# Altium PCB PCB1.PcbDoc
Units mm, origin at the board's own origin, x right, y up, seen from the top; angles counter-clockwise.
Board outline 152.4 x 101.6 mm, 2 copper layers (Top Layer, Bottom Layer); 2 components, 4 nets, 20 pads, 1 vias.
Unrouted connection lines stored in the file: 1.
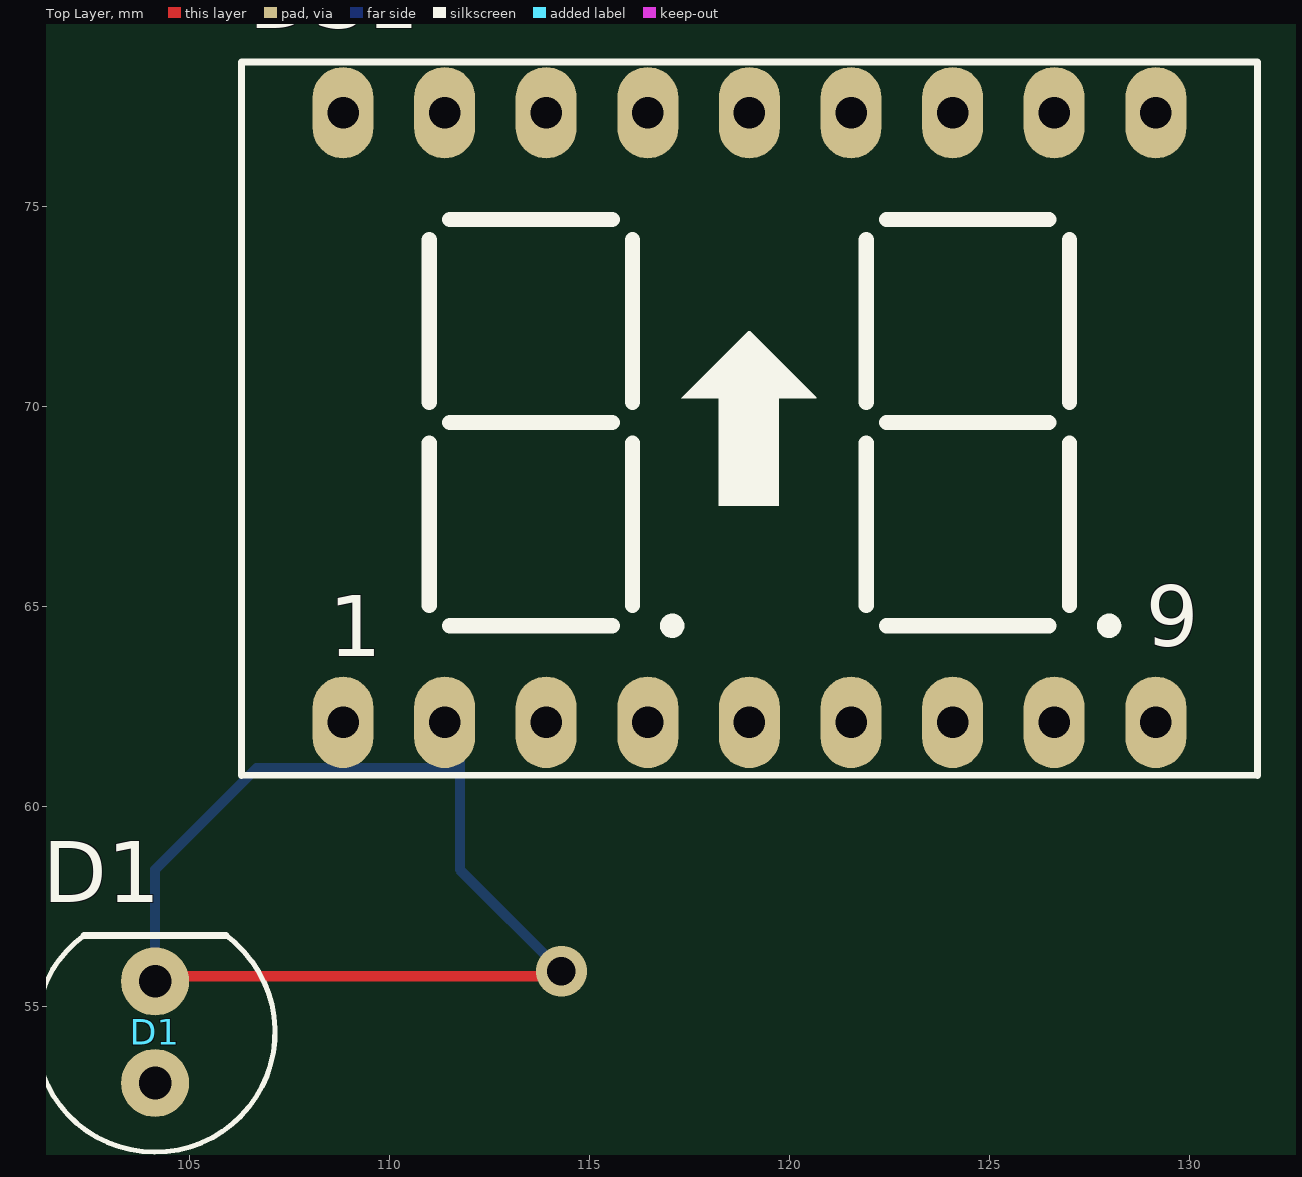
[diagram p0: Top Layer view]
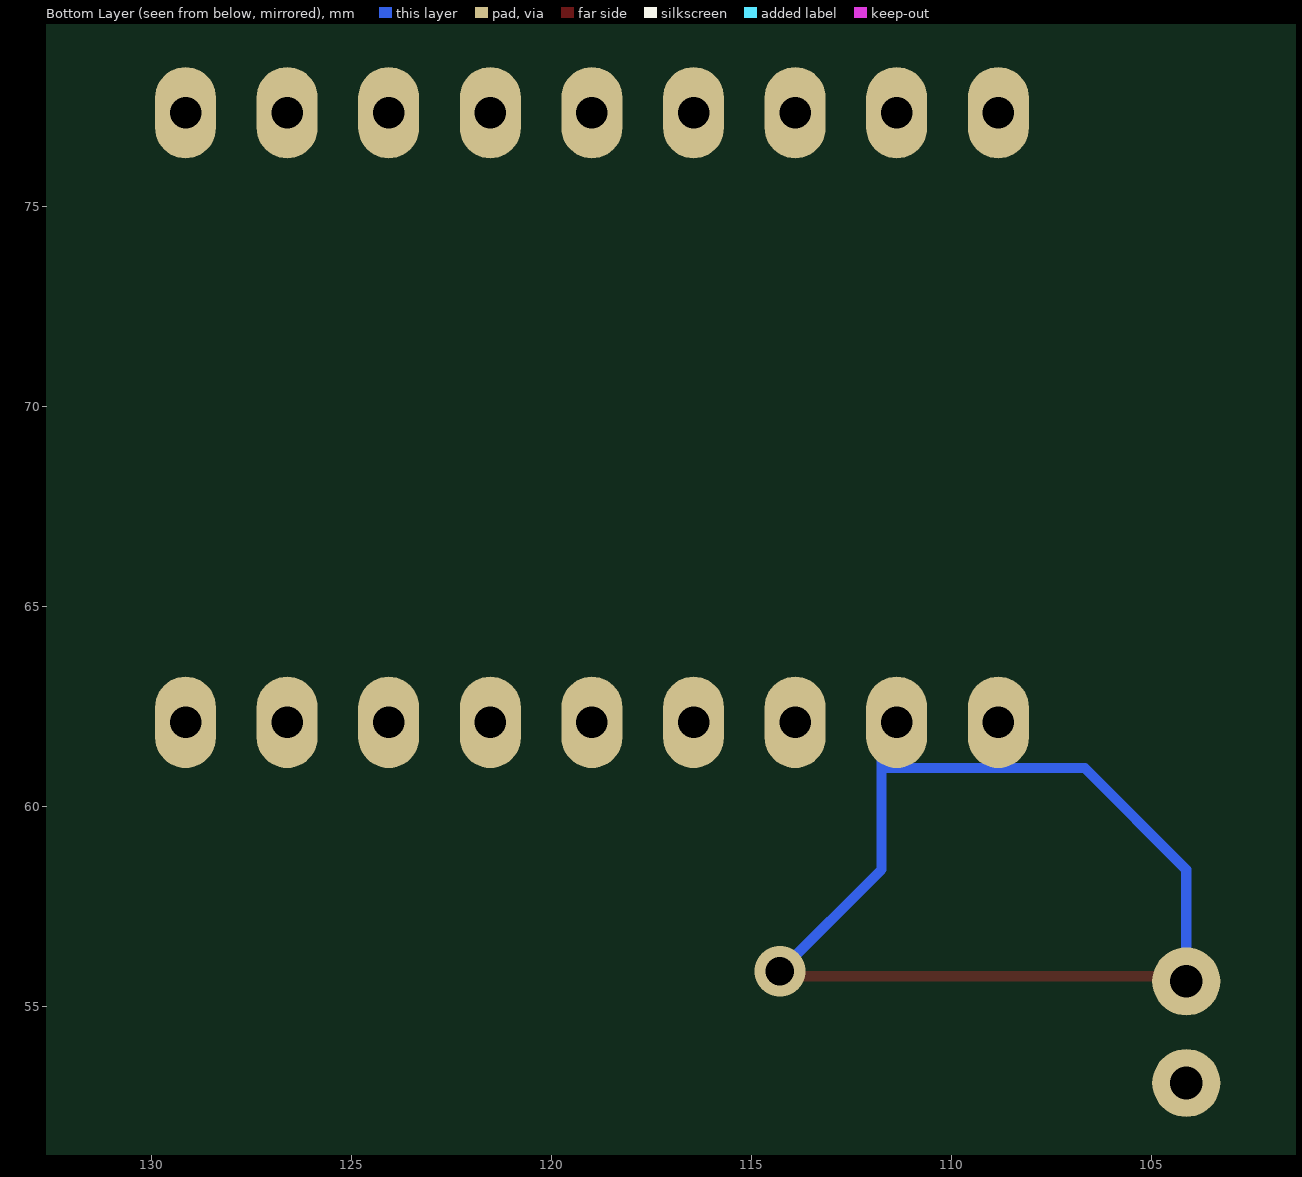
[diagram p1: Bottom Layer view, seen from below]

## Layer stack, top to bottom
Top Solder: solder mask 0.0102, Solder Resist, Dk 3.5
Top Layer: signal copper 0.0356
Dielectric 1: dielectric 0.32, FR-4, Dk 4.8
Bottom Layer: signal copper 0.0356
Bottom Solder: solder mask 0.0102, Solder Resist, Dk 3.5

## Board outline
25.4,25.4 177.8,25.4 177.8,127 25.4,127

## Design rules (kind name [scope] priority, off if disabled: settings)
Clearance [All] p1: gap=0.2 ignorepadtopadclearanceinfootprint=FALSE
PolygonConnect [All] p1: connectstyle=Relief reliefconductorwidth=0.254 reliefentries=4 polygonreliefangle="90 Angle" airgapwidth=0.254
RoomDefinition Sheet1 [InComponentClass('Sheet1')] p1: confinementstyle=ConfineIn formatcopy=TRUE lockcomponents=FALSE outline 0,1.524 50.8,1.524 50.8,26.924 0,26.924
RoutingVias [All] p1: holewidth=0.711 width=1.27 viastyle="Through Hole" minholewidth=0.711 minwidth=1.27 maxholewidth=0.711 maxwidth=1.27
SolderMaskExpansion [All] p1: expansion=0.102 istentingtop=FALSE
Width [All] p1: maxlimit=0.254 minlimit=0.254 preferedwidth=0.254
30 further rules are at their usual default settings.

## Components (designator, comment, footprint, x,y, rotation, side; value= is the part's Value field where it differs from the comment)
D1 "LED" "LED-0 5mm BLUE" 104.14,54.356 r180 top
DS1 "7SEG-D" 7SEGD 108.839,62.103 r0 top value="LED 7D SEG"

## Footprints (in the part's own frame and the unit in brackets; to place one, negate y for a bottom-side part, rotate by r counter-clockwise, add the part's x,y. Pads: shape width x height; smd on the part's side, far side on the other; paste and mask are expansions set on the pad)
7SEGD [mil] "DIP 18Leads; Body 24 x 15 mm; Pitch 0.5 mm"
  oval 60x90 hole 31 paste+0: 1(0,0) 2(100,0) 3(200,0) 5(400,0) 6(500,0) 7(600,0) 8(700,0) 9(800,0) 10(800,600) 11(700,600) 12(600,600) 13(500,600) 14(400,600) 15(300,600) 16(200,600) 17(100,600) 18(0,600)
  oval 60x90 hole 31: 4(300,0)
  silkscreen extent -100,-52 900,650, body extent -25,30 865,585, height 284
"LED-0 5mm BLUE" [mil] "Typical LED; BLUE; 2 Leads; Solder Pad 35mil"
  round 67 hole 32: 1(0,50) 2(0,-50)
  silkscreen extent -118,-96 118,118, body extent -118,-96 119,117, height 345

## Part data
D1: "Typical LED", LatestRevisionDate=08-Jul-2005, LatestRevisionNote="Mech Layer 1 removed.", PackageReference=LED-1, Published=8-Jun-2000, Publisher="Altium Limited"
DS1: library part LED7D, "Two 7 Seg Dipslay"

## Via types
v1: diameter 1.27, hole 0.711, Top Layer to Bottom Layer, 1 vias

## Nets (pads, with @x,y where several pads share a name; then routed paths per layer and width w, separated by ;. In a path a pad name is that pad's centre, name@x,y a point inside that pad or via, vN(x,y) a via of type N, cw(c..) or ccw(c..) an arc to the next point about the centre after c; other vN are vias at no path point)
GND: 
NetD1_1: D1.1
NetD1_2: D1.2 DS1.2 DS1.14 | length 18.5
  Top Layer w0.254: D1.2 104.267,55.753 114.173,55.753 v1(114.3,55.88)
  Bottom Layer w0.254: DS1.2 111.76,62.484 111.76,58.42 v1(114.3,55.88)
VCC: 
pads on no net: DS1.1 DS1.3 DS1.4 DS1.5 DS1.6 DS1.7 DS1.8 DS1.9 DS1.10 DS1.11 DS1.12 DS1.13 DS1.15 DS1.16 DS1.17 DS1.18
copper on no net: | length 11.5
  Bottom Layer w0.254: 104.14,55.626 104.14,58.42 106.68,60.96 111.76,60.96

## Text inside footprints (layer, text, board x,y; h text height)
DS1: Top Overlay "1" at 108.483,63.754 h1.52; Top Overlay "9" at 128.905,64.008 h1.52